# EAGLE board Diode SMD Test (EAGLE 7.6.0)

Size 20 x 30 mm. Coordinates in mm from the lower left corner, seen from the top.
Outline: 0,0 20,0 20,30 0,30 0,0
Copper layers (1*16): Top 0.035mm / dielectric 1.5mm / Bottom 0.035mm
Design rules "default": minimum track width 10mil, minimum drill 24mil, track to track 8mil, track to pad 8mil, pad to pad 8mil, via to via 8mil, smd to smd 8mil, copper to edge 40mil, drill to drill 8mil, minimum pad ring 10mil, minimum via ring 8mil, stop-mask expansion 4mil, vias tented up to drill 0mil, thermal gap 10mil

## Footprints (pad centres in the part's own frame; a part is rotated, then mirrored left to right if it is on the bottom)
DO35Z10 = drill 0.813 long: A 5.08,0; C -5.08,0
SMADIODE = smd 2.54 x 2.54: A 2.349,0; C -2.349,0
1206 = smd 1.6 x 1.803: A -1.422,0; C 1.422,0
R1206 = smd 1.6 x 1.803: 1 -1.422,0; 2 1.422,0
MOLEX_480371000 = smd 1.2 x 2: 1 3.5,2.6; 2 1,2.6; 3 -1,2.6; 4 -3.5,2.6 | drill 2.5: M1 -5.7,0; M2 5.7,0 | hole 1.1: -2.25,0; 2.25,0

## Placement (x,y rotation side)
D1  1N821  [DO35Z10]  13,20 270 top
D2  [SMADIODE]  7,21 270 top
LED_1  [1206]  18,27 270 top
LED_2  [1206]  2,27 270 top
R_1K_LED_1  [R1206]  9.5,12 90 top
R_1K_LED_2  [R1206]  4,12 90 top
X1  USB-A  [MOLEX_480371000]  10,2.5 0 top

## Library data of the parts
D1 = diode
D2 LED_1 LED_2 R_1K_LED_1 R_1K_LED_2 X1 = adafruit

## Nets
GND: R_1K_LED_1.1 R_1K_LED_2.1 X1.4
LED_1: LED_1.C R_1K_LED_1.2
N$1: D1.C LED_1.A
N$2: LED_2.C R_1K_LED_2.2
N$3: D2.C LED_2.A
VCC: D1.A D2.A X1.1

## Tracks (layer width: path | path; a pad name or v marks a point on that pad's centre or on a via)
GND  (2 unrouted)
LED_1  (1 unrouted)
N$1  (1 unrouted)
N$2  (1 unrouted)
N$3  (1 unrouted)
VCC  (2 unrouted)

## Text on the board
tNames: + | + | RAMBO BOOSTER | RAMBO BOOSTER | GND
bNames: www.FredericTorres.com | PCB v1 /smd - 2020.03